# Altium PCB Manette.PcbDoc
Units mm, origin at the board's own origin, x right, y up, seen from the top; angles counter-clockwise.
Board outline 100 x 100 mm, 2 copper layers (Top Layer, Bottom Layer); 37 components, 45 nets, 177 pads, 20 vias.
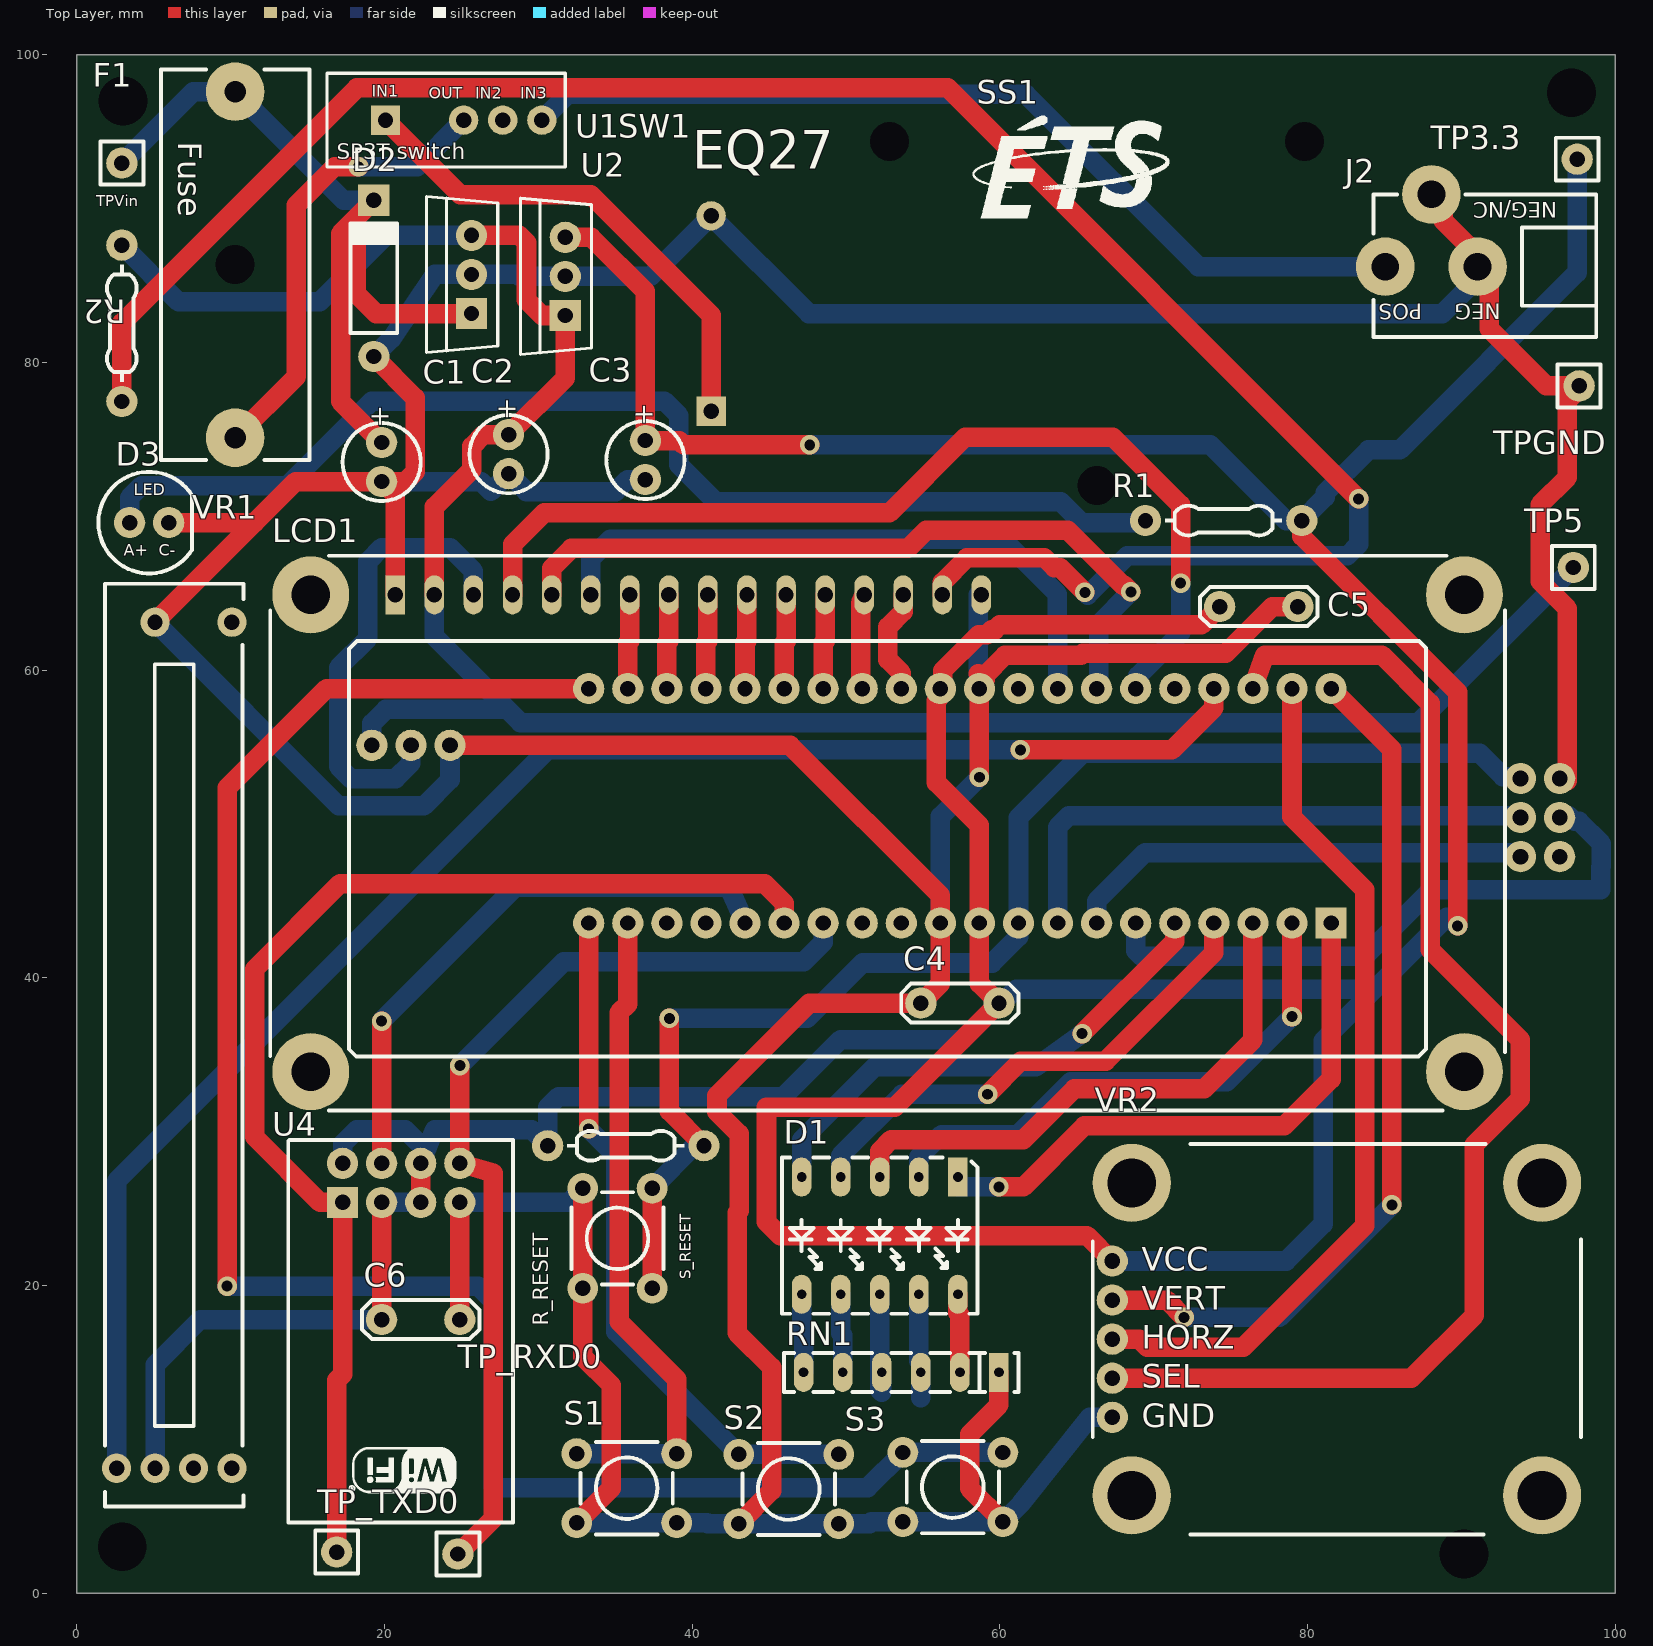
[diagram p0: Top Layer view]
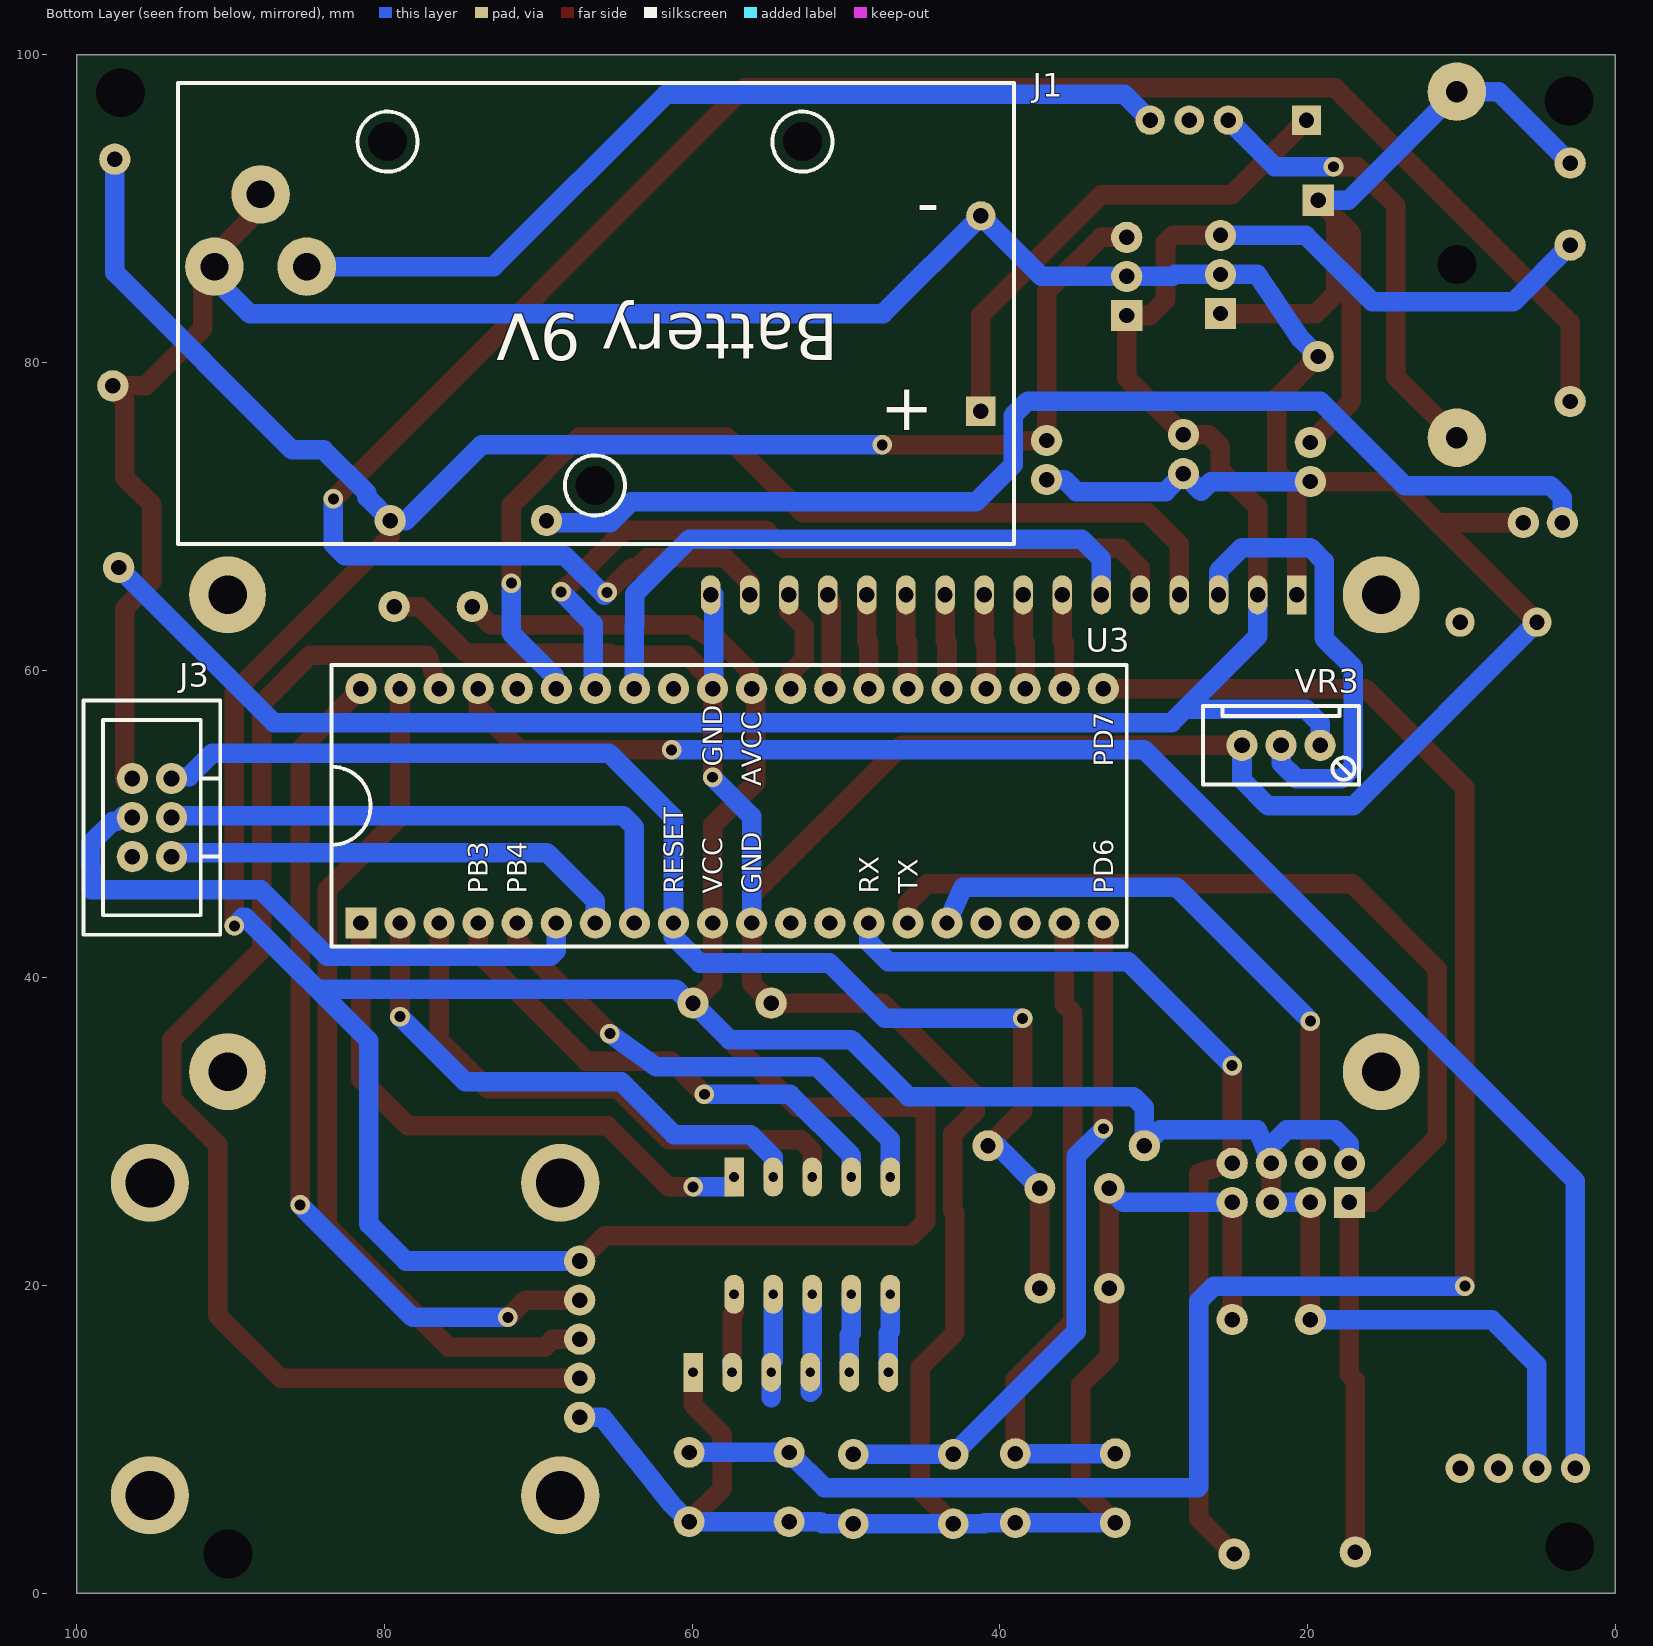
[diagram p1: Bottom Layer view, seen from below]
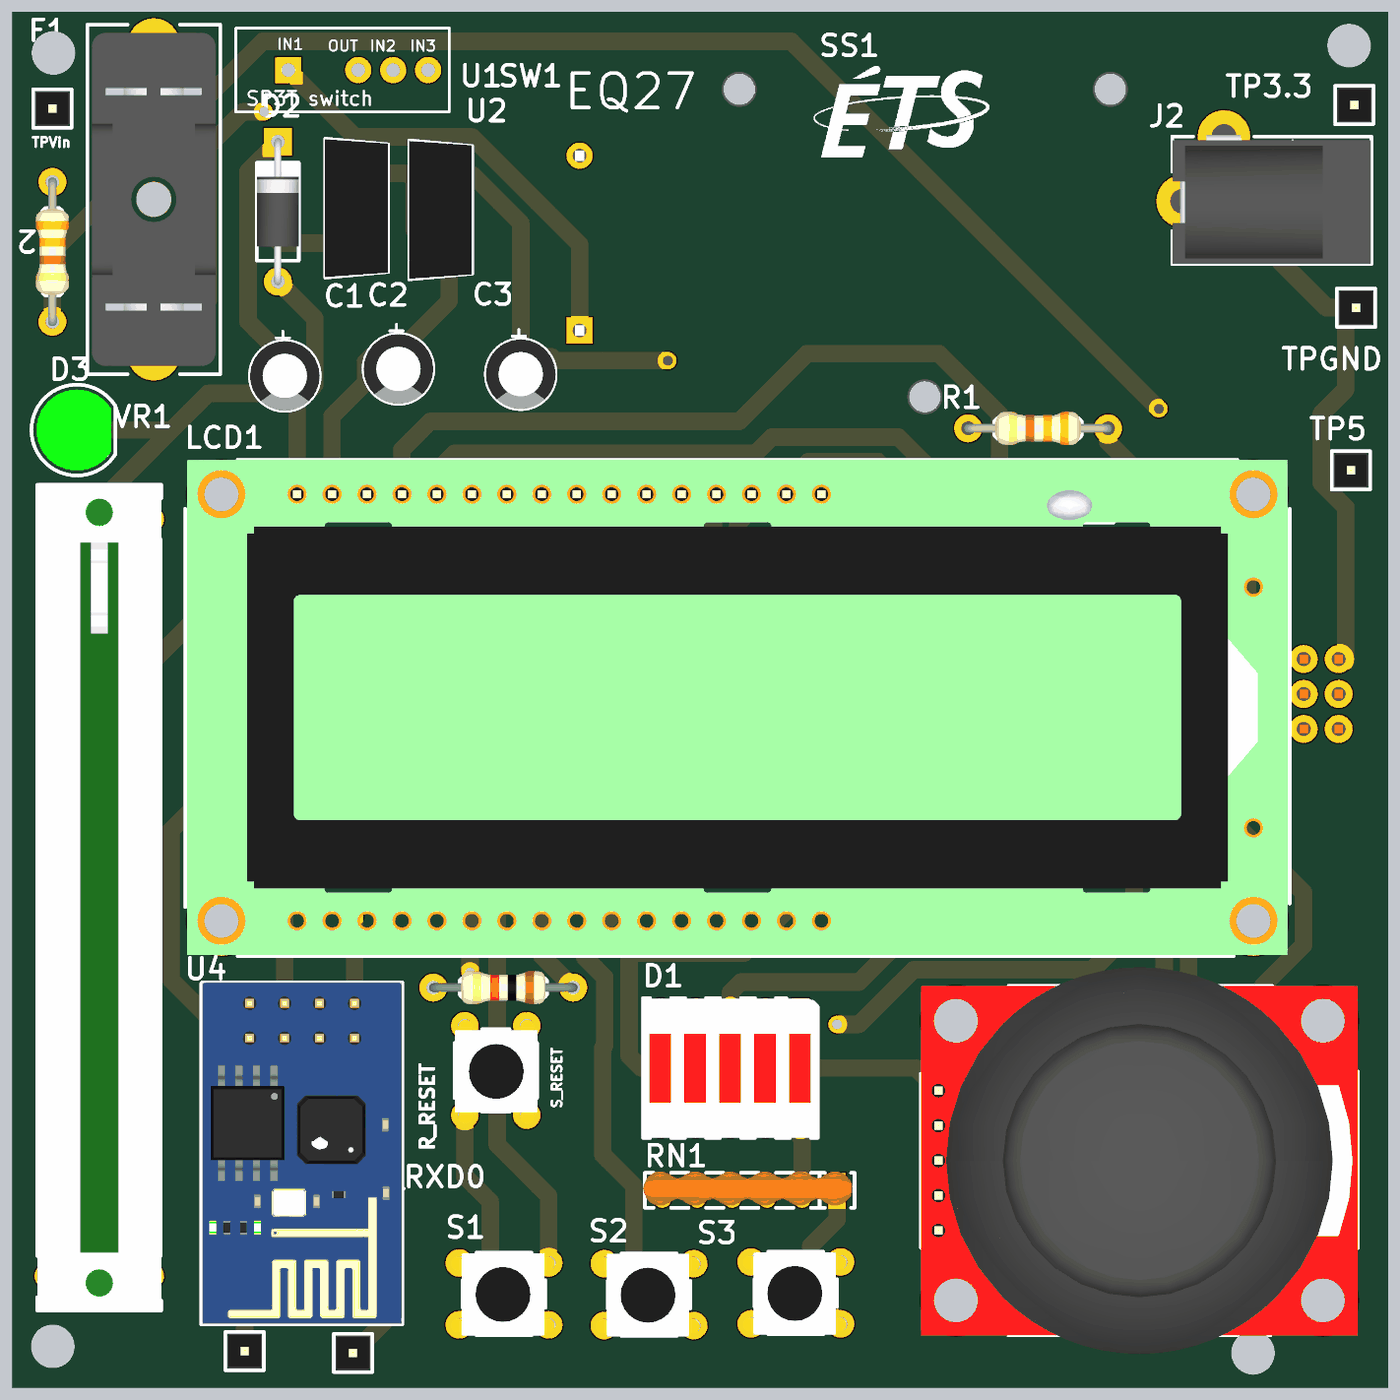
[diagram p2: 3D render of the assembled board from above, using the file's embedded part models]
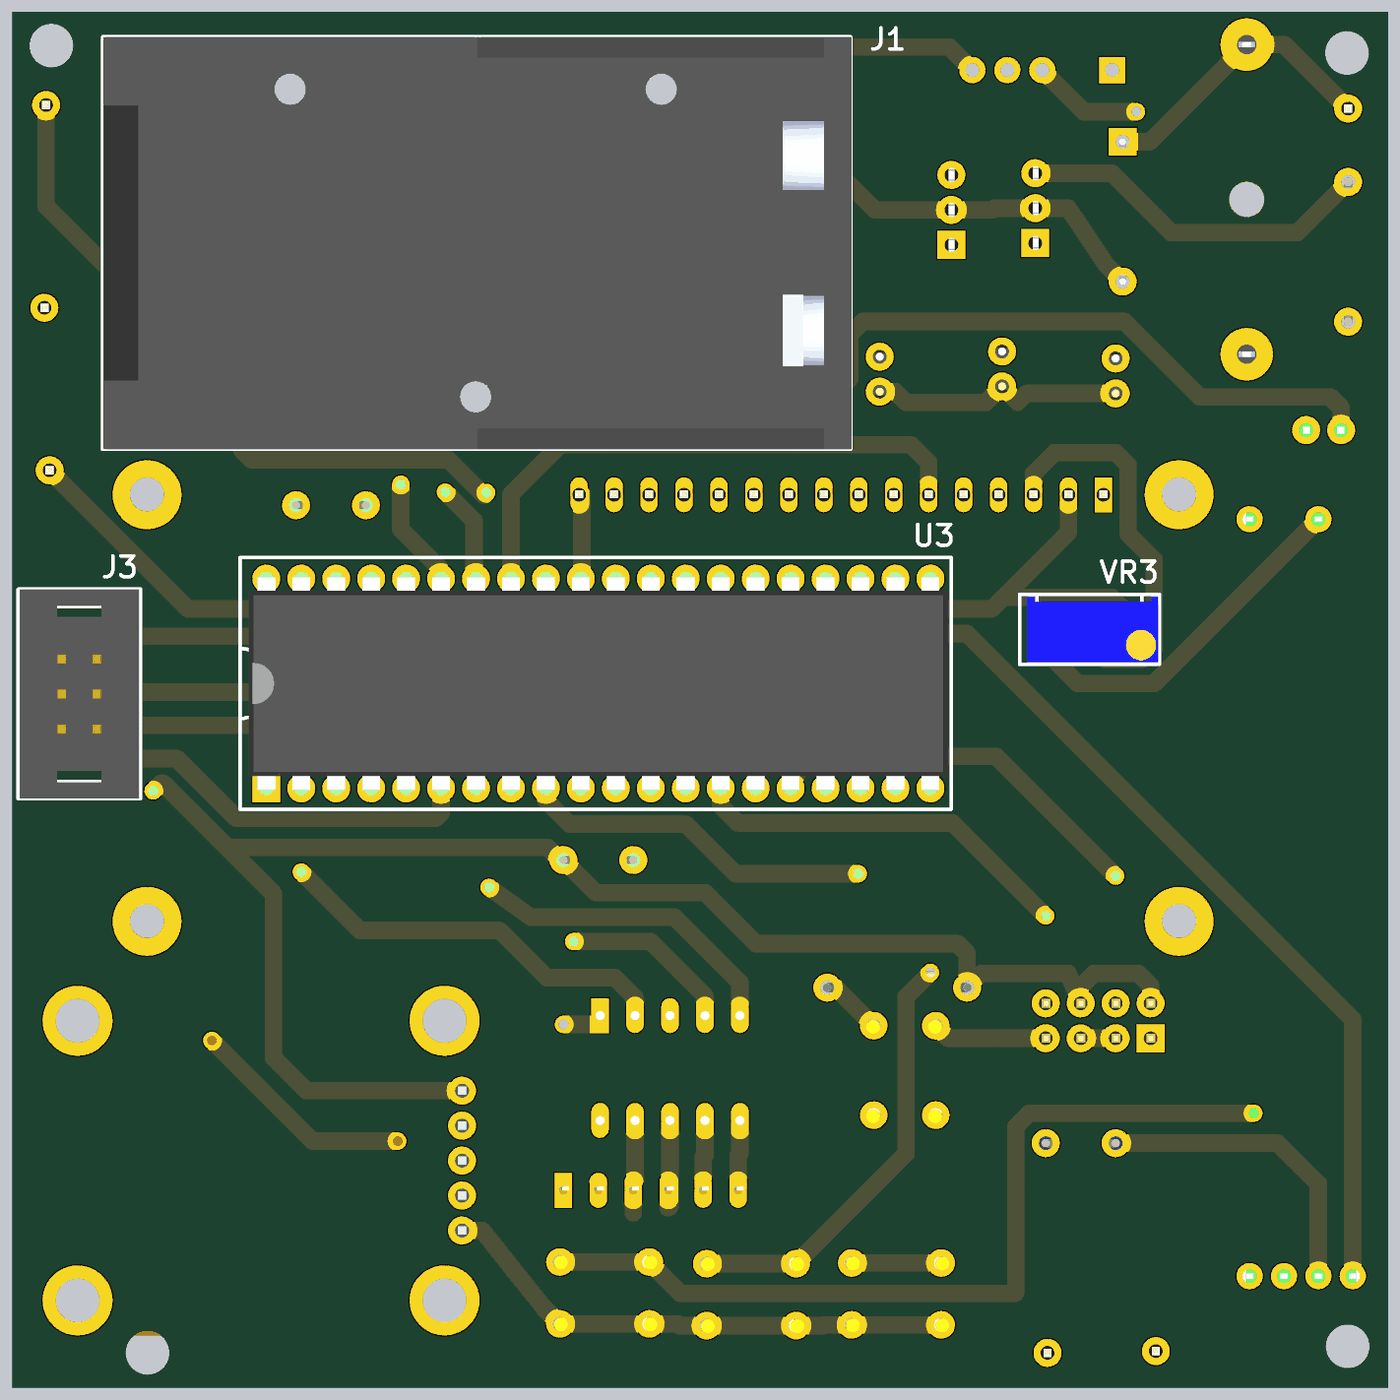
[diagram p3: 3D render of the assembled board from below, using the file's embedded part models]

## Layer stack, top to bottom
Top Solder: solder mask 0.0102, Solder Resist, Dk 3.5
Top Layer: signal copper 0.0356
Dielectric 1: dielectric 0.32, FR-4, Dk 4.8
Bottom Layer: signal copper 0.0356
Bottom Solder: solder mask 0.0102, Solder Resist, Dk 3.5

## Board outline
0,0 0,100 100,100 100,0

## Design rules (kind name [scope] priority, off if disabled: settings)
BoardOutlineClearance [All] p1: gap=0.254 ignorepadtopadclearanceinfootprint=FALSE
Clearance [All] p1: gap=0.508 ignorepadtopadclearanceinfootprint=FALSE except(0: Arc-Hole Track-Hole SMDPad-Hole THPad-Hole Via-Hole Fill-Hole Poly-Hole Region-Hole Text-Hole)
ComponentClearance [All] p1 off: gap=0.254 collisioncheckmode=3 verticalgap=0.254 showdistances=FALSE
Height [All] p1: minheight=0 maxheight=50.8 prefheight=12.7
HoleSize [All] p1: absolutevalues=TRUE maxlimit=6.3 minlimit=0.3 maxpercent=80.000 minpercent=20.000
PolygonConnect [All] p1: connectstyle=Relief reliefconductorwidth=0.254 reliefentries=4 polygonreliefangle="90 Angle" airgapwidth=0.254
RoutingVias [All] p1: holewidth=0.711 width=1.27 viastyle="Through Hole" minholewidth=0.711 minwidth=1.27 maxholewidth=0.711 maxwidth=1.27
SilkToSilkClearance [All] p1 off: silktosilkclearance=0.254
SilkToSolderMaskClearance [IsPad] p1: minsilkscreentomaskgap=0.025 clearancetoexposedcopper=TRUE
SolderMaskExpansion [All] p1: expansion=0.102 istentingtop=FALSE
Width [All] p1: maxlimit=3.81 minlimit=1.27 preferedwidth=1.27
25 further rules are at their usual default settings.

## Components (designator, comment, footprint, x,y, rotation, side; value= is the part's Value field where it differs from the comment)
C1 "22uF" "Cap Pol (100mil, 80mil)" 19.812,73.533 r270 top
C2 "22uF" "Cap Pol (100mil, 80mil)" 28.067,74.041 r270 top
C3 "22uF" "Cap Pol (100mil, 80mil)" 36.957,73.66 r270 top
C4 "1uF" "Cap UNPOL (200mil, 80mil)" 57.404,38.354 r180 top
C5 "1uF" "Cap UNPOL (200mil, 80mil)" 76.835,64.135 r0 top
C6 "1uF" "Cap UNPOL (200mil, 80mil)" 22.352,17.78 r180 top
D1 "Rouge" "BARGRAPH 5 DEL" 57.277,27.051 r270 top
D2 "1N4001" "DO-41 (AN) 400mil" 19.304,90.551 r270 top
D3 "LED" LED_GREEN_5mm-100mil 4.699,69.596 r0 top
F1 "Fuse" Fuse 10.287,86.36 r270 top
J1 "9 VPCB through hole" "9V PCB Through hole" 41.232,83.186 r0 bottom value=9V
J2 "Prise DC 12V" "Prise DC 12V" 85.059,86.233 r180 top value=12V
J3 "ISP" "ISP 2x3 avec detrompeur" 95.123,50.419 r90 bottom
LCD1 "LCD 16x2" "LCD 16x2 sans socket" 20.701,64.897 r0 top
R1 "330R" "Resistor 330 (400mils)" 74.549,69.723 r0 top
R2 "330R" "Resistor 330 (400mils)" 2.921,82.55 r90 top
R_RESET "10k" "Resistor 10k (400mils)" 35.687,29.083 r180 top
RN1 "Réseau de 5 résistances" "RESEAU 5 RESISTANCES" 59.944,14.351 r270 top value=330R
S1 "Push_button" MJTP1230 32.489,9.072 r0 top
S2 "Push_button" MJTP1230 43.03,9.017 r0 top
S3 "Push_button" MJTP1230 53.698,9.144 r0 top
S_RESET "Push_button" MJTP1230 32.893,19.812 r90 top
SS1 "ETS_Logo" ETS-Logo 58.801,89.408 r0 top
SW1 "1825161-1" 1825161-1 20.066,95.758 r0 top
TP3.3 "*" "HEADER MALE 1X1" 97.536,93.218 r90 top
TP5 "*" "HEADER MALE 1X1" 97.282,66.675 r0 top
TP_RXD0 "*" "HEADER MALE 1X1" 24.765,2.54 r90 top
TP_TXD0 "*" "HEADER MALE 1X1" 16.891,2.667 r90 top
TPGND "*" "HEADER MALE 1X1" 97.663,78.486 r90 top
TPVin "*" "HEADER MALE 1X1" 2.921,92.964 r90 top
U1 "LM7805" TO-220FP-3 25.908,85.725 r90 top
U2 "BA33BC0" TO-220FP-3 32.004,85.598 r90 top
U3 "ATMEGA324A" ATMEGA324A-DIP 81.534,43.561 r90 bottom
U4 "ESP8266" ESP8266 28.346,29.464 r180 top
VR1 "10k" PS45M-0MC2BR10KN 6.33,35.619 r90 top
VR2 "Joystick" "JOYSTICK SUR BREAKOUT&SOCKET" 81.915,16.51 r90 top
VR3 "Trimpot" Trimpot 21.717,55.118 r0 bottom value=10k

## Footprints (in the part's own frame and the unit in brackets; to place one, negate y for a bottom-side part, rotate by r counter-clockwise, add the part's x,y. Pads: shape width x height; smd on the part's side, far side on the other; paste and mask are expansions set on the pad)
"9V PCB Through hole" [mm] "9V Battery holder for PCB Through hole"
  rect 1.905x1.905 hole 1: 1(0,6.35)
  round 1.905 hole 1: 2(0,-6.35)
  round 0 hole 2.54 unplated mask+0.102: +(11.6,-11.175) +(25.09,11.175) +(38.57,-11.175)
  silkscreen extent -2.16,-14.99 52.2,14.99, body extent -2.22,-14.98 52.13,14.99, height 20.62
1825161-1 [mm] "Interrupteur 3 positions SP3T"
  rect 1.905x1.905 hole 1: 1(0,0)
  round 1.905 hole 1: 2(5.08,0) 3(7.62,0) 4(10.16,0)
  silkscreen extent -3.81,-3.05 11.68,3.05, body extent -3.91,-3.15 11.53,3.15, height 9.2
ATMEGA324A-DIP [mil] "ATMEGA 324A 40 DIP"
  rect 80x80 hole 39.37: 1(0,0)
  round 80 hole 39.37: 2(0,-100) 3(0,-200) 4(0,-300) 5(0,-400) 6(0,-500) 7(0,-600) 8(0,-700) 9(0,-800) 10(0,-900) 11(0,-1000) 12(0,-1100) 13(0,-1200) 14(0,-1300) 15(0,-1400) 16(0,-1500) 17(0,-1600) 18(0,-1700) 19(0,-1800) 20(0,-1900) 21(600,-1900) 22(600,-1800) 23(600,-1700) 24(600,-1600) 25(600,-1500) 26(600,-1400) 27(600,-1300) 28(600,-1200) 29(600,-1100) 30(600,-1000) 31(600,-900) 32(600,-800) 33(600,-700) 34(600,-600) 35(600,-500) 36(600,-400) 37(600,-300) 38(600,-200) 39(600,-100) 40(600,0)
  silkscreen extent -60,-1960 660,75, body extent -5,-1950 605,50, height 175
"BARGRAPH 5 DEL" [mm] "Bargraph 5 LED rouge"
  rect 2.54x1.27 hole 0.635: 1(0,0)
  oval 2.54x1.27 hole 0.635: 2(0,-2.54) 3(0,-5.08) 4(0,-7.62) 5(0,-10.16) 6(7.62,-10.16) 7(7.62,-7.62) 8(7.62,-5.08) 9(7.62,-2.54) 10(7.62,0)
  silkscreen extent -1.27,-11.43 8.89,1.27, body extent -1.23,-11.42 8.87,1.18, height 8.07
"Cap Pol (100mil, 80mil)" [mil] "Cap. Electrolytic. Polarized w/ 100mil spacing & 80mil pads"
  round 80 hole 39.37: 1(50,0) 2(-50,0)
  silkscreen extent -100,-100 100,100, body extent -100,-100 100,100, height 408
"Cap UNPOL (200mil, 80mil)" [mil] "Capitor unpolarized w/ 200mil spacing & 80mil pads"
  round 80 hole 39.37: 1(100,0) 2(-100,0)
  silkscreen extent -150,-50 150,50, body extent -112,-43 112,43, height 222
"DO-41 (AN) 400mil" [mil] "Diode DO-41 (400 mil)"
  round 80 hole 39.37: 1(400,0)
  rect 80x80 hole 39.37: 2(0,0)
  silkscreen extent 60,-60 340,60, body extent -10,-60 410,60, height 217
ESP8266 [mil] "Wifi Module with header 2x4"
  rect 80x80 hole 39.37: 1(436,160)
  round 80 hole 39.37: 2(436,60) 3(336,160) 4(336,60) 5(236,160) 6(236,60) 7(136,160) 8(136,60)
  silkscreen extent 0,0 575,979, body extent 1,1 572,977, height 178
ETS-Logo [mm] "Logo de l'ÉTS"
  silkscreen extent -0.56,0 12.22,6.63
Fuse [mm] "Fuse"
  round 3.81 hole 1.4: 1(11.25,0) 2(-11.25,0)
  round 0 hole 2.54: ""(0,0)
  silkscreen extent -12.7,-4.83 12.7,4.83, body extent -12.1,-4.49 12.11,4.5, height 11.99
"HEADER MALE 1X1" [mil] "Header male 1x1"
  round 80 hole 39.37: 1(0,0)
  silkscreen extent -55,-55 55,55, body extent -50,-50 50,50, height 336
"ISP 2x3 avec detrompeur" [mil] "Connecteur ISP 2x3 avec detrompeur"
  round 80 hole 40: 1(-100,-50) 2(-100,50) 3(0,-50) 4(0,50) 5(100,-50) 6(100,50)
  silkscreen extent -300,-175 300,175, body extent -299,-171 299,171, height 362
"JOYSTICK SUR BREAKOUT&SOCKET" [mil] "Joystick sur breakout et socket"
  round 80 hole 40: 1(200,575) 2(100,575) 3(0,575) 4(-100,575) 5(-200,575)
  round 200 hole 125: ""(-400,525) ""(-400,-525) ""(400,525) ""(400,-525)
  silkscreen extent -500,-625 500,625, body extent -553,-625 553,625, height 1665
"LCD 16x2 sans socket" [mm]
  round 5 hole 2.5: 0(-5.5,-31) 0(-5.5,0) 0(69.5,-31) 0(69.5,0)
  rect 1.27x2.54 hole 1: 1(0,0)
  oval 1.27x2.54 hole 1: 2(2.54,0) 3(5.08,0) 4(7.62,0) 5(10.16,0) 6(12.7,0) 7(15.24,0) 8(17.78,0) 9(20.32,0) 10(22.86,0) 11(25.4,0) 12(27.94,0) 13(30.48,0) 14(33.02,0) 15(35.56,0) 16(38.1,0)
  silkscreen extent -8.13,-33.53 72.14,2.54, body extent -8,-33.46 72,2.54, height 12.74
LED_GREEN_5mm-100mil [mil] "GREEN LED 5mm with 100 mils spacing"
  round 80 hole 39.37: 1(-50,0) 2(50,0)
  silkscreen extent -130,-130 110,130, body extent -116,-116 98,116, height 354
MJTP1230 [mm] "Interrupteur tactile"
  round 2 hole 1: 1(0,0) 1(6.5,0) 2(0,-4.5) 2(6.5,-4.5)
  silkscreen extent 0.25,-5.25 6.25,0.75, body extent -0.57,-5.29 6.93,0.71, height 4.3
"Prise DC 12V" [mm] "Prise DC 12V"
  round 3.81 hole 1.8: 1(0,0) 2(-6,0) 3(-3,-4.699)
  silkscreen extent -13.72,-4.7 0.76,4.57, body extent -13.68,-4.83 0.72,4.57, height 11.23
PS45M-0MC2BR10KN [mm] "Potentiomètre à glissière 45mm"
  round 1.905 hole 1: 1(-27.5,1.25) 2(-27.5,3.75) 3(27.5,1.25) 4(-27.5,-3.75) 5(-27.5,-1.25) 6(27.5,-3.75)
  silkscreen extent -30,-4.5 30,4.5, body extent -30,-4.5 30,4.5, height 22
"RESEAU 5 RESISTANCES" [mm] "Ressitor network 5R + COM"
  rect 2.54x1.27 hole 0.635: 1(0,0)
  oval 2.54x1.27 hole 0.635: 2(0,-2.54) 3(0,-5.08) 4(0,-7.62) 5(0,-10.16) 6(0,-12.7)
  silkscreen extent -1.27,-13.97 1.27,1.27, body extent -1.37,-14.1 1.12,1.09, height 5.49
"Resistor 10k (400mils)" [mil] "Resistor 100 (400mils)"
  round 80 hole 39.37: 1(-200,0) 2(200,0)
  silkscreen extent -150,-38 150,38, body extent -212,-48 212,48, height 100
"Resistor 330 (400mils)" [mil] "Resistor 330 (400mils)"
  round 80 hole 39.37: 1(-200,0) 2(200,0)
  silkscreen extent -150,-38 150,38, body extent -212,-48 212,48, height 100
TO-220FP-3 [mil] "TO, Thru-Hole, Vertical, Heatsink Mounted; 3 In-Line Leads; Pitch 2.54 mm"
  rect 80x80 hole 39.37: 1(-100,10)
  round 80 hole 39.37: 2(0,10) 3(100,10)
  silkscreen extent -200,-57 200,125, body extent -197,-55 197,125, height 875
Trimpot [mil] "Timpot vertical"
  round 80 hole 40: 1(-100,0) 2(0,0) 3(100,0)
  silkscreen extent -200,-100 200,100, body extent -197,-95 178,95, height 460

## Part data
C1 C2 C3: library part Electrolytique, "Capacitor", Supplier Part Number 1=BC2665CT-ND, Supplier 1=Digi-Key
C4 C5 C6: library part Ceramique, "Capacitor", Supplier Part Number 1=445-5331-ND, Supplier 1=Digi-Key
D1: library part "Bargraph 5 DEL", "Bargraph 5 DEL", Supplier Part Number 1=1497-1081-5-ND, Supplier 1=Digi-Key
D2: "Diode 1N4001"
D3: library part LED_verte, "DEL verte 5mm (translucide)", color=green, Supplier Part Number 1=1080-1111-ND, Supplier 1=Digi-Key
F1: Supplier Part Number 1=36-4628-ND, Supplier 1=Digi-Key
J1: "9V PCB battery holder through hole", Supplier Part Number 1=BH9V-PC-ND, Supplier 1=Digi-Key
J2: Supplier Part Number 1=CP-102AH-ND, Supplier 1=Digi-Key
J3: library part "ISP 2x3", "Connecteur ISP 2x3", Supplier Part Number 1=A26530-18-ND, Supplier 1=Digi-Key
LCD1: "Écran LCD compatible HD44780"
R1 R2: library part "Resistor 330R", "Resistor 330R", Supplier Part Number 1=CF14JT330RCT-ND, Supplier 1=Digi-Key
R_RESET: library part "Resistor 10k", "Résistor 10k"
RN1: "Réseau de 5 résistances pour bus", Supplier Part Number 1=4606X-1-331LF-ND, Supplier 1=Digi-Key
S1 S2 S3 S_RESET: "Bouton poussoir tactile"
SW1: "Interrupteur SP3T à glissière", Supplier Part Number 1=450-1611-ND, Supplier 1=Digi-Key
TP3.3 TP5 TP_RXD0 TP_TXD0 TPGND TPVin: library part "Test point", "Point de test"
U1: "Régulateur de tension 5V", Supplier Part Number 1=296-47192-ND, Supplier 1=Digi-Key
U2: library part "LDO 3.3V", "LDO 3.3V, 1A, 0.3V@200mA, up to 16V (BA33BC0)", Supplier Part Number 1=BA33BC0T-ND, Supplier 1=Digi-Key
U3: "Microcontrôleur ATmega324A avec 32K de flash", Supplier Part Number 1=ATMEGA32L-8PU-ND, ComponentLink1Description=Datasheet, ComponentLink1URL=http://www.atmel.com/Images/doc2503.pdf, Supplier 1=Digi-Key, Supplier 2=Digi-Key, Supplier Part Number 2=ED3048-5-ND
VR1: library part PS45M-0MC2BR10KN, "Potentiomètre à glissière double 10k", Supplier Part Number 1=987-1405-ND, Supplier 1=Digi-Key
VR2: "2 axes thumb joystick avec bouton", Supplier Part Number 1=1568-1526-ND, Supplier 1=Digi-Key, Supplier 2=Digi-Key, Supplier Part Number 2=S6103-ND
VR3: "Potentiomètre linéaire", Supplier Part Number 1=A105870-ND, Supplier 1=Digi-Key

## Free pads (board coordinates)
  round 1.524 hole 3.175 unplated: 0(2.951,3.01) 0(3,97) 0(90.17,2.54) 0(97.155,97.536)

## Via types
v1: diameter 1.27, hole 0.711, Top Layer to Bottom Layer, 20 vias

## Nets (pads, with @x,y where several pads share a name; then routed paths per layer and width w, separated by ;. In a path a pad name is that pad's centre, name@x,y a point inside that pad or via, vN(x,y) a via of type N, cw(c..) or ccw(c..) an arc to the next point about the centre after c; other vN are vias at no path point)
3.3V: C3.2 C4.2 C5.2 C6.1 R1.2 R_RESET.2 TP3.3.1 U2.3 U3.10 U3.30 U4.2 U4.3 U4.5 U4.6 VR1.1 VR2.1 | length 366.9
  Top Layer w1.27: C6.1 U4.3 ; U4.5 U4.6 ; U2.3 33.439,88.138 36.957,84.62 C3.2 39.154,74.93 39.44,74.644 v1(47.644,74.644) ; VR2.1 65.659,23.241 45.72,23.241 44.831,24.13 44.831,31.577 53.167,31.577 C4.2 58.674,39.624 U3.10 58.674,49.905 55.88,52.699 55.88,58.008 55.988,58.116 55.988,58.655 U3.30 56.28,58.947 56.28,59.963 58.618,62.301 59.152,62.301 59.463,62.612 59.662,62.612 59.991,62.941 73.101,62.941 C5.2 ; R1.2 79.629,68.707 89.757,58.579 v1(89.757,43.377)
  Bottom Layer w1.27: VR1.1 5.08,14.84 8.02,17.78 C6.1 ; U4.2 17.272,29.21 18.18,30.118 21.355,30.118 22.352,29.121 ; U4.3 U4.5 ; U4.6 22.771,28.946 23.26,30.118 29.572,30.118 R_RESET.2 30.607,31.572 31.312,32.277 45.949,32.277 49.657,35.985 57.575,35.985 C4.2 60.15,38.354 61.058,39.262 84.347,39.262 ; v1(47.644,74.644) 73.692,74.644 78.613,69.723 R1.2 81.153,71.247 81.153,71.52 83.96,74.327 86.011,74.327 97.536,85.852 TP3.3.1 ; VR2.1 78.613,21.59 81.02,23.997 81.02,35.909 89.04,43.929 89.205,43.929 v1(89.757,43.377)
5V: C2.2 LCD1.2 R2.2 TP5.1 U1.3 U2.1 VR3.1 | length 153
  Top Layer w1.27: LCD1.2 23.241,70.612 25.673,73.044 25.673,74.549 26.435,75.311 C2.2 31.75,78.994 U2.1 30.245,83.058 29.229,84.074 29.229,87.801 28.765,88.265 U1.3
  Bottom Layer w1.27: R2.2 6.61,83.941 15.786,83.941 20.11,88.265 U1.3 ; VR3.1 19.177,56.54 20.085,57.448 27.986,57.448 ; LCD1.2 23.241,62.193 27.986,57.448 ; TP5.1 87.202,56.595 28.838,56.595 27.986,57.448
GND: C1.1 C2.1 C3.1 C4.1 C5.1 C6.2 D2.1 D3.2 J1.2 J2.2 J2.3 J3.6 LCD1.1 LCD1.16 RN1.1 S1.2 S2.2 S3.2 S_RESET.1 TPGND.1 U1.2 U2.2 U3.11 U3.31 U4.7 VR1.3 VR2.5 VR3.3 | length 438.3
  Top Layer w1.27: VR1.3 11.557,69.596 ; D3.2 11.557,69.596 ; D2.1 21.99,77.705 21.99,72.898 21.355,72.263 C1.1 ; LCD1.1 20.701,71.374 C1.1 ; VR3.3 46.368,55.118 56.134,45.352 U3.11 56.134,39.624 C4.1 47.625,38.354 41.613,32.342 41.613,31.29 43.053,29.85 43.053,24.866 42.926,24.739 42.926,16.922 45.173,14.675 45.173,6.66 S2.2@43.03,4.517 ; C6.2 U4.7 ; S1.2@32.489,4.572 34.741,6.824 34.741,13.513 32.893,15.361 32.893,19.812 S_RESET.1@32.893,26.312 ; U3.31@58.598,58.877 U3.31 ; v1(58.674,53.039) U3.31 ; RN1.1 59.944,12.236 58.033,10.325 58.033,6.809 S3.2@60.198,4.644 ; C5.1 77.724,64.135 74.676,61.087 65.405,61.087 65.278,60.96 60.32,60.96 59.055,59.695 59.055,59.388 58.674,59.007 U3.31 ; J2.3@88.821,90.932 88.821,89.233 91.821,86.233 91.821,82.194 95.529,78.486 TPGND.1 97.663,78.28 96.901,77.518 96.901,72.538 95.123,70.76 95.123,65.781 96.901,64.003 J3.6@96.901,52.803 ; 11.557,69.596 14.224,72.263 C1.1
  Bottom Layer w1.27: VR1.3 17.024,51.175 22.555,51.175 24.257,52.876 VR3.3 ; D2.1 20.466,81.553 23.26,85.725 U1.2 28.619,85.725 28.746,85.598 U2.2 37.294,85.598 J1.2 47.589,83.179 88.767,83.179 J2.2@91.821,86.233 ; C1.1 26.276,72.263 26.918,71.622 C2.1 29.229,71.609 35.027,71.609 35.808,72.39 C3.1 ; U4.7 31.981,25.4 S_RESET.1@32.893,26.312 ; S1.2@32.489,4.572 38.989,4.572 40.964,4.572 41.019,4.517 43.03,4.517 49.53,4.517 51.53,4.517 51.657,4.644 53.698,4.644 60.198,4.644 61.36,5.806 65.841,11.43 VR2.5 ; U3.11 56.134,50.499 v1(58.674,53.039) ; U3.31@58.598,58.877 LCD1.16@58.598,64.897
NetD3_1: D3.1 R1.1 | length 75.5
  Bottom Layer w1.27: D3.1 3.429,71.222 4.21,72.003 13.684,72.003 19.171,77.489 38.195,77.489 39.135,76.549 39.135,73.349 41.523,70.961 63.959,70.961 65.322,69.598 69.344,69.598 R1.1
NetF1_1: F1.1 SW1.2 | length 29.9
  Top Layer w1.27: F1.1 14.268,79.091 14.268,90.24 16.758,92.729 v1(18.307,92.729)
  Bottom Layer w1.27: v1(18.307,92.729) 22.117,92.729 SW1.2
NetJ2_1: J2.1 SW1.4 | length 60.9
  Bottom Layer w1.27: SW1.4 31.896,97.428 61.716,97.428 72.911,86.233 J2.1@85.821,86.233
NetLCD1_3: LCD1.3 VR3.2 | length 30.1
  Bottom Layer w1.27: VR3.2 21.717,53.95 20.72,52.953 17.799,52.953 17.012,53.74 17.012,60.166 18.917,62.071 18.917,67.075 19.806,67.964 24.257,67.964 25.781,66.44 LCD1.3
NetLCD1_4: LCD1.4 U3.35 | length 63.5
  Top Layer w1.27: LCD1.4 28.321,68.174 30.372,70.225 52.826,70.225 57.753,75.152 67.342,75.152 71.755,70.739 v1@71.755,65.913 ; U3.35 U3.35@68.98,58.947
  Bottom Layer w1.27: U3.35@68.98,59.633 71.774,62.427 v1@71.774,65.551
  other v1: 71.755,65.659
NetLCD1_5: LCD1.5 U3.34 | length 49.2
  Top Layer w1.27: LCD1.5 30.861,66.624 32.15,67.913 54.029,67.913 55.203,69.088 64.423,69.088 67.979,65.532 68.072,65.532 v1(68.516,65.087) ; U3.34 U3.34@66.44,58.947
  Bottom Layer w1.27: U3.34@66.44,58.947 66.44,63.011 v1@68.472,65.043
NetLCD1_6: LCD1.6 U3.33 | length 40.8
  Bottom Layer w1.27: LCD1.6 33.401,67.234 34.69,68.523 60.166,68.523 63.748,64.941 63.748,62.916 63.754,62.909 U3.33
NetLCD1_7: LCD1.7 U3.22 | length 6.1
  Top Layer w1.27: U3.22 35.814,61.766 35.941,61.893 LCD1.7
NetLCD1_8: LCD1.8 U3.23 | length 6.1
  Top Layer w1.27: U3.23 38.354,61.766 38.481,61.893 LCD1.8
NetLCD1_9: LCD1.9 U3.24 | length 6.1
  Top Layer w1.27: U3.24 40.894,61.766 41.021,61.893 LCD1.9
NetLCD1_10: LCD1.10 U3.25 | length 6.1
  Top Layer w1.27: U3.25 43.434,61.766 43.561,61.893 LCD1.10
NetLCD1_11: LCD1.11 U3.26 | length 6.1
  Top Layer w1.27: U3.26 45.974,61.766 46.101,61.893 LCD1.11
NetLCD1_12: LCD1.12 U3.27 | length 6.1
  Top Layer w1.27: U3.27 48.514,61.766 48.641,61.893 LCD1.12
NetLCD1_13: LCD1.13 U3.28 | length 6.2
  Top Layer w1.27: U3.28 50.946,58.909 50.946,64.351 LCD1.13
NetLCD1_14: LCD1.14 U3.29 | length 6.9
  Top Layer w1.27: U3.29 53.594,59.811 52.724,60.681 52.724,62.808 53.721,63.805 LCD1.14
NetLCD1_15: LCD1.15 R2.1 | length 136.8
  Top Layer w1.27: R2.1 2.921,82.575 18.199,97.854 56.616,97.854 v1(83.331,71.139) ; LCD1.15 56.261,65.71 57.861,67.31 62.903,67.31 63.545,66.668 63.914,66.668 v1(65.526,65.056)
  Bottom Layer w1.27: v1(65.526,65.056) 65.71,64.872 68.275,67.437 82.587,67.437 83.331,68.181 v1(83.331,71.139)
PA0: U3.40 VR2.2 | length 56.9
  Top Layer w1.27: VR2.2 70.86,19.05 v1(71.984,17.926) ; U3.40 85.49,54.845 v1(85.49,25.241)
  Bottom Layer w1.27: v1(71.984,17.926) 78.175,17.926 v1(85.49,25.241)
PA1: U3.39 VR2.3 | length 56.8
  Top Layer w1.27: VR2.3 69.05,16.51 69.585,15.975 75.817,15.975 83.712,23.87 83.712,45.739 78.994,50.457 U3.39
PA2: U3.38 VR2.4 | length 83
  Top Layer w1.27: VR2.4 86.76,13.97 90.849,18.059 90.849,29.153 93.847,32.15 93.847,35.96 87.979,41.827 87.979,57.842 84.843,60.979 77.235,60.979 U3.38
PA3: U3.37 VR1.2 | length 104
  Top Layer w1.27: v1(61.335,54.817) 71.181,54.817 73.914,57.55 U3.37
  Bottom Layer w1.27: VR1.2 2.58,26.788 30.609,54.817 v1(61.335,54.817)
PB0: D1.1 U3.1 | length 37.9
  Top Layer w1.27: v1(59.938,26.41) 61.525,26.41 65.488,30.372 78.486,30.372 81.534,33.42 U3.1
  Bottom Layer w1.27: D1.1 57.277,26.41 v1(59.938,26.41)
PB1: D1.2 U3.2 | length 35.4
  Top Layer w1.27: v1(78.994,37.484) U3.2
  Bottom Layer w1.27: D1.2 54.737,28.34 56.21,29.813 61.182,29.813 64.603,33.234 74.744,33.234 v1(78.994,37.484)
PB2: D1.3 U3.3 | length 36.5
  Top Layer w1.27: D1.3 52.197,27.686 52.196,27.687 52.196,28.739 52.94,29.483 61.538,29.483 64.84,32.785 73.279,32.785 76.454,35.96 U3.3
PB3: D1.4 U3.4 | length 33
  Top Layer w1.27: v1(59.201,32.429) 61.36,34.588 66.872,34.588 73.914,41.631 U3.4
  Bottom Layer w1.27: D1.4 49.657,28.448 53.638,32.429 v1(59.201,32.429)
PB4: D1.5 U3.5 | length 33
  Top Layer w1.27: v1(65.348,36.366) 71.374,42.393 U3.5
  Bottom Layer w1.27: D1.5 47.117,29.467 51.857,34.207 62.02,34.207 62.325,34.207 v1(65.348,36.366)
PB5: J3.4 U3.6 | length 40.1
  Bottom Layer w1.27: U3.6 68.834,41.77 69.209,41.396 83.712,41.396 88.036,45.72 99.079,45.72 99.079,47.205 99.111,47.237 99.111,48.722 97.668,50.165 97.361,50.165 96.98,50.546 J3.4@96.774,50.546
PB6: J3.1 U3.7 | length 30.3
  Bottom Layer w1.27: U3.7 66.294,44.983 69.444,48.133 J3.1@93.871,48.133
PB7: J3.3 U3.8 | length 36.9
  Bottom Layer w1.27: U3.8 63.754,49.802 64.498,50.546 J3.3@94.107,50.546
PD0: TP_RXD0.1 U3.14 U4.8 | length 62.5
  Top Layer w1.27: TP_RXD0.1 27.07,4.845 27.07,27.305 U4.8 v1(24.892,34.29)
  Bottom Layer w1.27: v1(24.892,34.29) 31.642,41.04 47.244,41.04 48.514,42.31 U3.14
PD1: TP_TXD0.1 U3.15 U4.1 | length 79.8
  Top Layer w1.27: TP_TXD0.1 16.891,13.837 17.272,14.218 U4.1 15.818,25.4 11.551,29.667 11.551,40.557 17.113,46.12 44.704,46.12 45.974,44.85 U3.15
PD2: U3.16 U4.4 | length 38
  Top Layer w1.27: U4.4 v1(19.812,37.186)
  Bottom Layer w1.27: v1(19.812,37.186) 28.518,45.891 42.393,45.891 U3.16
PD5: S1.1 U3.19 | length 42.8
  Top Layer w1.27: U3.19 35.814,38.299 35.249,37.734 35.249,17.647 38.989,13.906 S1.1@38.989,9.072
  Bottom Layer w1.27: S1.1@32.489,9.072 S1.1@38.989,9.072
PD6: S2.1 U3.20 | length 45.1
  Top Layer w1.27: v1(33.274,30.188) U3.20
  Bottom Layer w1.27: v1(33.274,30.188) 35.046,28.416 35.046,17.001 43.03,9.017 S2.1@49.53,9.017
PD7: S3.1 U3.21 | length 122.4
  Top Layer w1.27: v1(9.773,19.958) 9.773,52.343 16.231,58.801 U3.21
  Bottom Layer w1.27: v1(9.773,19.958) 26.079,19.958 27.07,18.967 27.07,6.928 27.146,6.852 51.406,6.852 53.698,9.144 S3.1@60.198,9.144
RD1: D1.10 RN1.2 | length 5.8
  Top Layer w1.27: D1.10 57.277,18.232 57.404,18.105 RN1.2
  Bottom Layer w1.27: RN1.2 57.404,14.986 RN1.2@57.422,14.986
RD2: D1.9 RN1.3 | length 6.8
  Bottom Layer w1.27: D1.9 54.737,15.113 54.864,14.986 54.864,12.713
RD3: D1.8 RN1.4 | length 7.7
  Bottom Layer w1.27: D1.8 52.197,13.202 52.324,13.075 RN1.4
RD4: D1.7 RN1.5 | length 5.1
  Bottom Layer w1.27: D1.7 49.657,16.885 49.784,16.758 49.784,16.053 RN1.5
RD5: D1.6 RN1.6 | length 5.1
  Bottom Layer w1.27: D1.6 47.117,17.012 47.244,16.885 47.244,16.834 RN1.6
RESET: J3.5 R_RESET.1 S_RESET.2 U3.9 | length 88.1
  Top Layer w1.27: S_RESET.2@37.393,19.812 S_RESET.2@37.393,26.312 ; v1(38.519,37.357) 38.519,31.331 R_RESET.1
  Bottom Layer w1.27: S_RESET.2@37.393,26.312 40.164,29.083 R_RESET.1 ; v1(38.519,37.357) 47.473,37.357 51.08,40.964 59.506,40.964 61.214,42.672 U3.9 61.214,50.413 65.411,54.61 91.186,54.61 92.71,53.086 J3.5@94.107,53.086
VBAT: J1.1 SW1.1 | length 32.7
  Top Layer w1.27: SW1.1 24.924,90.9 33.42,90.9 41.232,83.088 J1.1
VIN: C1.2 D2.2 F1.2 TPVin.1 U1.1 | length 52
  Top Layer w1.27: D2.2 18.174,89.421 ; C1.2 17.139,77.476 17.139,88.386 18.174,89.421 ; U1.1 19.45,83.185 18.174,84.461 18.174,89.421
  Bottom Layer w1.27: TPVin.1 7.567,97.61 F1.2 17.346,90.551 D2.2
pads on no net: F1. J1.+ J3.2 LCD1.0 SW1.3 U3.12 U3.13 U3.17 U3.18 U3.32 U3.36 VR1.4 VR1.5 VR1.6 VR2.

## Silkscreen, mask and mechanical layers (free items; w line width, h text height)
Top Overlay:
  text "EQ27" at 40.005,92.583 h2.5
Mechanical 1:
  lines w0.254: 0,100 0,0 100,0 100,100

## Dimensions
0,100 to 100,0 on Keep-Out Layer

## Text inside footprints (layer, text, board x,y; h text height)
C1: Top Overlay "+" at 19.177,77.216 h1.27 r270
C2: Top Overlay "+" at 27.432,77.724 h1.27 r270
C3: Top Overlay "+" at 36.322,77.343 h1.27 r270
D3: Top Overlay "C-" at 5.334,67.437 h0.76; Top Overlay "A+" at 3.048,67.437 h0.76
J1: Bottom Overlay "+" at 44.28,78.233 h3.05 r180; Bottom Overlay "-" at 43.899,91.187 h3.05 r180; Bottom Overlay "Battery 9V" at 50.503,83.186 h3.05 r180
J2: Top Overlay "NEG/NC" at 96.235,90.424 h1.02 r180; Top Overlay "NEG" at 92.552,83.82 h1.02 r180; Top Overlay "POS" at 87.472,83.82 h1.02 r180
SW1: Top Overlay "IN3" at 28.829,97.155 h0.76; Top Overlay "OUT" at 22.86,97.155 h0.76; Top Overlay "IN2" at 25.908,97.155 h0.76; Top Overlay "IN1" at 19.177,97.282 h0.76; Top Overlay "SP3T switch" at 16.891,93.218 h1.02
U3: Bottom Overlay "PD7" at 32.639,53.721 h1.27 r270; Bottom Overlay "PD6" at 32.639,45.466 h1.27 r270; Bottom Overlay "TX" at 45.339,45.466 h1.27 r270; Bottom Overlay "RX" at 47.879,45.466 h1.27 r270; Bottom Overlay "GND" at 58.039,53.721 h1.27 r270; Bottom Overlay "AVCC" at 55.499,52.451 h1.27 r270; Bottom Overlay "PB4" at 70.739,45.466 h1.27 r270; Bottom Overlay "PB3" at 73.279,45.466 h1.27 r270; Bottom Overlay "VCC" at 58.039,45.466 h1.27 r270; Bottom Overlay "GND" at 55.499,45.466 h1.27 r270; Bottom Overlay "RESET" at 60.579,45.466 h1.27 r270
U4: Mechanical 13 "CUTOUT POLYGON" at 28.091,5.649 h0.25 r180; Mechanical 13 "ANTENNA AREA" at 28.091,5.141 h0.25 r180
VR2: Top Overlay "GND" at 69.215,10.795 h1.52; Top Overlay "SEL" at 69.215,13.335 h1.52; Top Overlay "HORZ" at 69.215,15.875 h1.52; Top Overlay "VERT" at 69.215,18.415 h1.52; Top Overlay "VCC" at 69.215,20.955 h1.52